# EAGLE board Rvg Robot (EAGLE 6.4)

Size 209.22 x 118.1 mm. Coordinates in mm from the lower left corner, seen from the top.
Outline: 0,0 209.22,0 209.22,118.1 0,118.1 0,0
Copper layers (1*16): Top 0.035mm / dielectric 1.5mm / Bottom 0.035mm
Design rules "default": minimum track width 10mil, minimum drill 24mil, track to track 8mil, track to pad 8mil, pad to pad 8mil, via to via 8mil, smd to smd 8mil, copper to edge 40mil, drill to drill 8mil, minimum pad ring 10mil, minimum via ring 8mil, stop-mask expansion 4mil, vias tented up to drill 0mil, thermal gap 10mil

## Footprints (pad centres in the part's own frame; a part is rotated, then mirrored left to right if it is on the bottom)
6410-02 = drill 1.016 long: 1 1.27,0; 2 -1.27,0
6410-06 = drill 1.016 long: 1 6.35,0; 2 3.81,0; 3 1.27,0; 4 -1.27,0; 5 -3.81,0; 6 -6.35,0
MA23-2 = drill 1.016 octagon: 1 -27.94,-1.27; 2 -27.94,1.27; 3 -25.4,-1.27; 4 -25.4,1.27; 5 -22.86,-1.27; 6 -22.86,1.27; 7 -20.32,-1.27; 8 -20.32,1.27; 9 -17.78,-1.27; 10 -17.78,1.27; 11 -15.24,-1.27; 12 -15.24,1.27; 13 -12.7,-1.27; 14 -12.7,1.27; 15 -10.16,-1.27; 16 -10.16,1.27; 17 -7.62,-1.27; 18 -7.62,1.27; 19 -5.08,-1.27; 20 -5.08,1.27; 21 -2.54,-1.27; 22 -2.54,1.27; 23 0,-1.27; 24 0,1.27; 25 2.54,-1.27; 26 2.54,1.27; 27 5.08,-1.27; 28 5.08,1.27; 29 7.62,-1.27; 30 7.62,1.27; 31 10.16,-1.27; 32 10.16,1.27; 33 12.7,-1.27; 34 12.7,1.27; 35 15.24,-1.27; 36 15.24,1.27; 37 17.78,-1.27; 38 17.78,1.27; 39 20.32,-1.27; 40 20.32,1.27; 41 22.86,-1.27; 42 22.86,1.27; 43 25.4,-1.27; 44 25.4,1.27; 45 27.94,-1.27; 46 27.94,1.27
B3F-10XX = drill 1.016 long: 1 -3.251,2.261; 2 3.251,2.261; 3 -3.251,-2.261; 4 3.251,-2.261
SOIC127P1030X265-20N = smd 1.981 x 0.559: 1 -4.674,5.715; 2 -4.674,4.445; 3 -4.674,3.175; 4 -4.674,1.905; 5 -4.674,0.635; 6 -4.674,-0.635; 7 -4.674,-1.905; 8 -4.674,-3.175; 9 -4.674,-4.445; 10 -4.674,-5.715; 11 4.674,-5.715; 12 4.674,-4.445; 13 4.674,-3.175; 14 4.674,-1.905; 15 4.674,-0.635; 16 4.674,0.635; 17 4.674,1.905; 18 4.674,3.175; 19 4.674,4.445; 20 4.674,5.715
FGPMMOPA6H = smd 2 x 1: P$1 -7.5,6.75; P$2 -7.5,5.25; P$3 -7.5,3.75; P$4 -7.5,2.25; P$5 -7.5,0.75; P$6 -7.5,-0.75; P$7 -7.5,-2.25; P$8 -7.5,-3.75; P$9 -7.5,-5.25; P$10 -7.5,-6.75; P$11 7.5,-6.75; P$12 7.5,-5.25; P$13 7.5,-3.75; P$14 7.5,-2.25; P$15 7.5,-0.75; P$16 7.5,0.75; P$17 7.5,2.25; P$18 7.5,3.75; P$19 7.5,5.25; P$20 7.5,6.75 | hole 3: 0.5,0.85
2POL254 = drill 1.2 long: 1 -1.27,0; 2 1.27,0

## Placement (x,y rotation side)
J1  22-27-2021-02  [6410-02]  57.15,7.62 0 top
J2  22-27-2021-02  [6410-02]  46.99,7.62 0 top
J3  22-27-2021-02  [6410-02]  7.62,7.62 0 top
J4  22-27-2021-02  [6410-02]  12.7,7.62 0 top
J5  22-27-2021-02  [6410-02]  22.86,7.62 0 top
J6  22-27-2021-02  [6410-02]  27.94,7.62 0 top
J7  22-27-2021-02  [6410-02]  -54.61,-25.4 0 top  (outside the outline)
J8  22-27-2021-02  [6410-02]  -54.61,-15.24 0 top  (outside the outline)
J9  22-27-2061-06  [6410-06]  -49.53,-40.64 0 top  (outside the outline)
J10  22-27-2061-06  [6410-06]  -49.53,-49.53 0 top  (outside the outline)
J11  22-27-2061-06  [6410-06]  -49.53,-58.42 0 top  (outside the outline)
J12  22-27-2061-06  [6410-06]  -49.53,-67.31 0 top  (outside the outline)
P8  MA23-2  [MA23-2]  49.53,44.45 0 top
P9  MA23-2  [MA23-2]  -27.94,-77.47 0 top  (outside the outline)
S1  [B3F-10XX]  -19.05,25.4 0 top  (outside the outline)
S2  [B3F-10XX]  -30.48,25.4 0 top  (outside the outline)
S3  [B3F-10XX]  -43.18,-26.67 0 top  (outside the outline)
U1  SN74LVC244ADW  [SOIC127P1030X265-20N]  21.59,69.85 0 top
U2  SN74LVC244ADW  [SOIC127P1030X265-20N]  35.56,69.85 0 top
U3  SN74LVC244ADW  [SOIC127P1030X265-20N]  49.53,69.85 0 top
U4  [FGPMMOPA6H]  -68.58,-71.12 0 top  (outside the outline)
X1  [2POL254]  6.35,59.69 0 top

## Library data of the parts
J1-J12 = con-molex; OC_FARNELL: unknown; OC_NEWARK: unknown
P8 P9 = con-lstb
S1-S3 = switch-omron; MPN: B3F-1000; OC_FARNELL: 176432; OC_NEWARK: 36M3542
U1-U3 = Texas Instruments_By_element14_Batch_1; MPN: SN74LVC244ADW; OC_FARNELL: 1102982; OC_NEWARK: 76C4240; PACKAGE: SOIC-20; SUPPLIER: Texas Instruments
U4 = adafruit
X1 = con-phoenix-254; OC_FARNELL: unknown; OC_NEWARK: unknown

## Nets
+3V3: J3.1 J5.1 J9.2 J10.2 J11.2 J12.2 P9.3 P9.4 U1.20 U2.20 U3.20
+5V: P9.5 P9.6 X1.1
AGND: P9.34
ENC_LF_A: J4.1 U3.2
ENC_LF_A_BUF: U3.18
ENC_LF_B: J4.2 U3.4
ENC_LF_B_BUF: U3.16
ENC_RT_A: J6.1 U3.6
ENC_RT_A_BUF: U3.14
ENC_RT_B: J6.2 U3.8
ENC_RT_B_BUF: U3.12
GND: J1.2 J2.2 J3.2 J5.2 J7.2 J9.1 J10.1 J11.1 J12.1 P8.2 P9.1 P9.2 P9.43 P9.44 P9.45 P9.46 S1.3 S1.4 S2.3 S2.4 S3.3 S3.4 U1.1 U1.10 U1.19 U2.1 U2.10 U2.19 U3.1 U3.10 U3.19 X1.2
H_BRG_S1: J8.1 U3.9
H_BRG_S1_BUF: U3.11
H_BRG_S2: J8.2 U3.7
H_BRG_S2_BUF: U3.13
PWR_BUT: J2.1 P9.9 S2.1 S2.2
SNR_BW_1: J9.6 U2.9
SNR_BW_1_BUF: U2.11
SNR_BW_2: J10.6 U2.7
SNR_BW_2_BUF: U2.13
SNR_BW_3: J11.6 U2.5
SNR_BW_3_BUF: U2.15
SNR_BW_4: J12.6 U2.3
SNR_BW_4_BUF: U2.17
SNR_PW-4: J12.5
SNR_PW_1: J9.5 U1.11
SNR_PW_1_BUF: U1.9
SNR_PW_2: J10.5 U1.13
SNR_PW_2_BUF: U1.7
SNR_PW_3: J11.5 U1.15
SNR_PW_3_BUF: U1.5
SNR_PW_4: U1.17
SNR_PW_4_BUF: U1.3
SNR_RX_1: J9.4 U2.18
SNR_RX_1_BUF: U2.2
SNR_RX_2: J10.4 U2.16
SNR_RX_2_BUF: U2.4
SNR_RX_3: J11.4 U2.14
SNR_RX_3_BUF: U2.6
SNR_RX_4: J12.4 U2.12
SNR_RX_4_BUF: U2.8
SNR_TX_1: J9.3 U1.2
SNR_TX_1_BUF: U1.18
SNR_TX_2: J10.3 U1.4
SNR_TX_2_BUF: U1.16
SNR_TX_3: J11.3 U1.6
SNR_TX_3_BUF: U1.14
SNR_TX_4: J12.3 U1.8
SNR_TX_4_BUF: U1.12
START: J7.1 S3.1 S3.2
SYS_RESET/: J1.1 P9.10 S1.1 S1.2
VCC: P9.7 P9.8
VDD: P9.32

## Tracks (layer width: path | path; a pad name or v marks a point on that pad's centre or on a via)
+3V3  (10 unrouted)
+5V  (2 unrouted)
ENC_LF_A  (1 unrouted)
ENC_LF_B  (1 unrouted)
ENC_RT_A  (1 unrouted)
ENC_RT_B  (1 unrouted)
GND  (31 unrouted)
H_BRG_S1  (1 unrouted)
H_BRG_S2  (1 unrouted)
PWR_BUT  (3 unrouted)
SNR_BW_1  (1 unrouted)
SNR_BW_2  (1 unrouted)
SNR_BW_3  (1 unrouted)
SNR_BW_4  (1 unrouted)
SNR_PW_1  (1 unrouted)
SNR_PW_2  (1 unrouted)
SNR_PW_3  (1 unrouted)
SNR_RX_1  (1 unrouted)
SNR_RX_2  (1 unrouted)
SNR_RX_3  (1 unrouted)
SNR_RX_4  (1 unrouted)
SNR_TX_1  (1 unrouted)
SNR_TX_2  (1 unrouted)
SNR_TX_3  (1 unrouted)
SNR_TX_4  (1 unrouted)
START  (2 unrouted)
SYS_RESET/  (3 unrouted)
VCC  (1 unrouted)